# Allegro board myproject5.brd
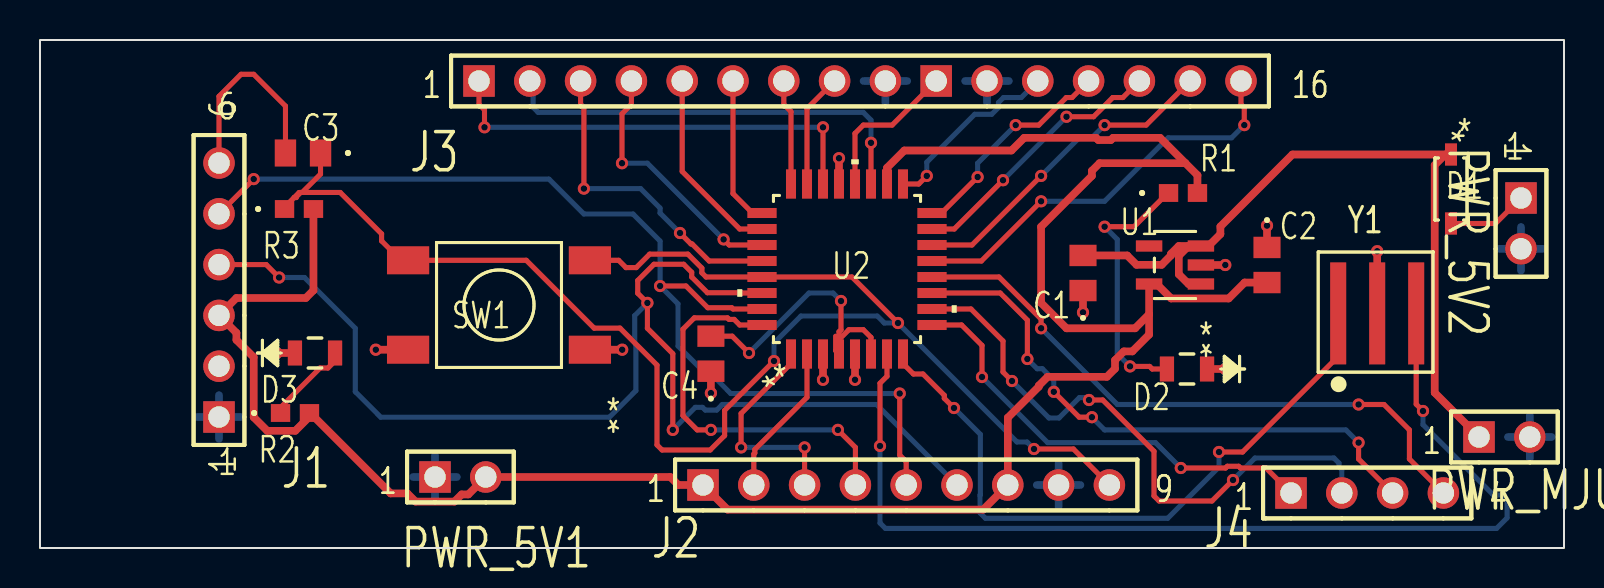
[diagram p0: board, top side]
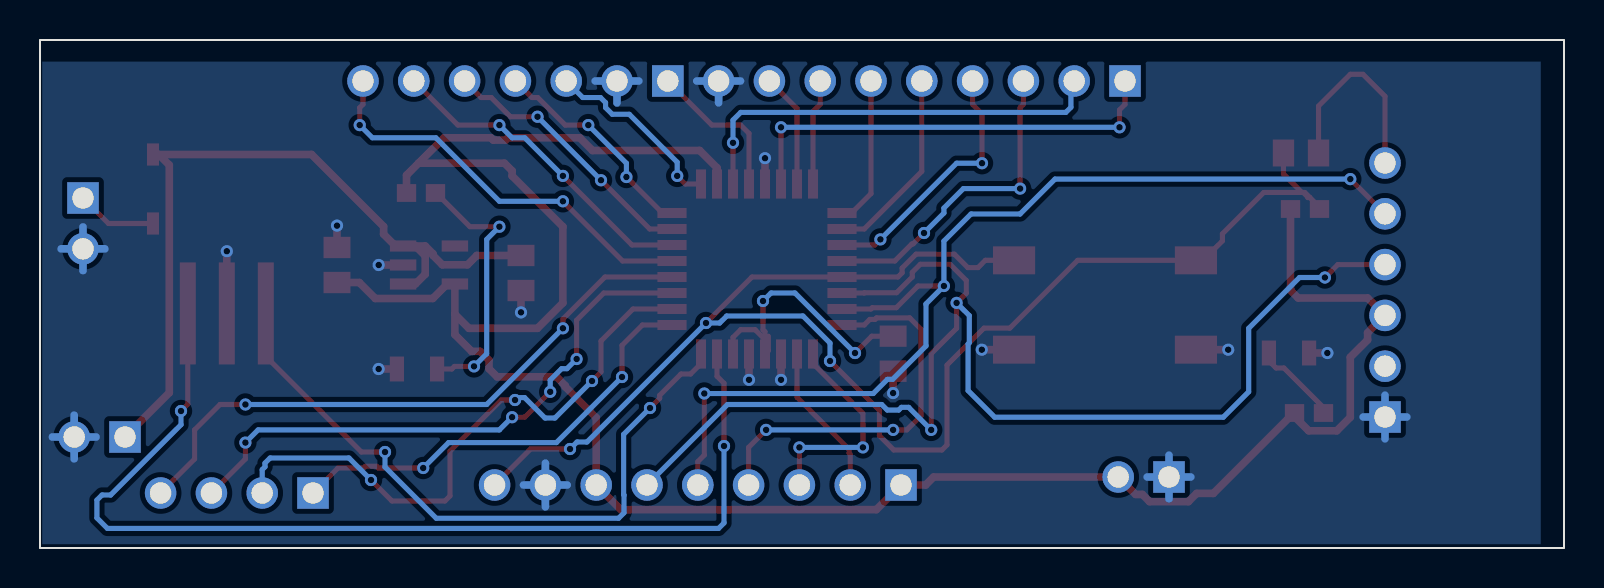
[diagram p1: board, bottom side, seen from below]

Outline 76.2 x 25.4 mm; copper layers: TOP, BOTTOM. Coordinates in mm from the lower left corner of the outline.
Outline path: rectangle 0,0 76.2,25.4

## Design rules (mm)
constraint set DEFAULT: min track width 0.254
nets with their own width: min track width 0.381; nets +5.0V +JACK GND

## Placement (name value [footprint] x y rotation side)
C1  1 uF  [CAP_0805C]  52.15 13.75 90 top
C2  100 nF  [CAP_0805C]  61.35 14.15 270 top
C3  100 nF  [CAP_0805C]  13.15 19.75 180 top
C4  100 nF  [CAP_0805C]  33.55 9.71 90 top
D1  DIODE  [SOD123]  70.55 17.95 270 top
D2  LED GREEN  [LED0805N_CML]  57.35 8.95 180 top
D3  LED GREEN  [LED0805N_CML]  13.75 9.75 0 top
J1  CON6 R/A  [BLKCON100VHTM1SQSW1006]  8.95 6.55 90 top
J2  CON9 R/A  [BLKCON100VHTM1SQSW1009]  33.15 3.15 0 top
J3  CON16  [BLKCON100VHTM1SQSW10016]  21.95 23.35 0 top
J4  CON4 R/A  [BLKCON100VHTM1SQSW1004]  62.55 2.75 0 top
NOREF  -  []  -31.8 -161.2 0 top
NOREF#2  -  []  0 25.4 0 top
NOREF#3  -  []  76.2 0 90 top
PWR_5V1  CON2  [BLKCON100VHTM1SQSW1002]  19.75 3.55 0 top
PWR_5V2  CON2  [BLKCON100VHTM1SQSW1002]  74.05 17.5 270 top
PWR_MJUMP1  CON2  [BLKCON100VHTM1SQSW1002]  71.95 5.55 0 top
R1  1k  [STA_RNCP0603]  57.15 17.75 0 top
R2  1k  [STA_RNCP0603]  12.75 6.75 0 top
R3  10k  [STA_RNCP0603]  12.95 16.95 0 top
SW1  SWITCH SPST-NO  [SW4_FSM-5P23]  22.95 12.15 180 top
U1  LDO  [SOT-23-5_MC]  56.75 14.15 180 top
U2  IC MCU 32KB  [MA]  40.35 13.95 90 top
Y1  16.00 MHz  [3-SMD]  66.95 11.75 0 top

## Library data of the parts
C1-C4 = CAP CER 0.1uF 50V X7R 0805: User Part Number: PN; Tolerance: TOL
D1 = DIODE 100V 300MA SOD12: User Part Number: PN; Tolerance: TOL
D2 D3 = LED GREEN 0805 SMD: User Part Number: PN; Tolerance: TOL
J1 = CONN HEADER R/A 6POS 2.54MM
J2 = CONN HEADER VERT 9POS 2.54MM
J3 = CONN HEADER VERT 16POS 2.54MM
J4 = CONN HEADER VERT 4POS 2.54MM
PWR_5V1 PWR_5V2 PWR_MJUMP1 = CONN HEADER VERT 2POS 2.54MM
R1 R2 = R 1K OHM 1% 1/8W 0603: User Part Number: PN; Tolerance: TOL
R3 = R 10K OHM 1% 1/8W 0603: User Part Number: PN; Tolerance: TOL
SW1 = SWITCH TACTILE SPST-NO 0.05A 24: User Part Number: PN; Tolerance: TOL
U1 = IC REG LINEAR 5V 300MA SOT23-5: User Part Number: PN; Tolerance: TOL
U2 = IC MCU 8BIT 32KB FLASH 32TQFP: User Part Number: PN; Tolerance: TOL
Y1 = RESONATOR 16.0MHZ 22PF SMD

## Footprints (pads in the part's own frame, mm; a bottom-side part is the same pattern mirrored in y, then rotated)
3-SMD
  rect 0.8x5.1 smd: 1(-2.04,-0.02) 2(-0.09,-0.02) 3(1.86,-0.02)
BLKCON100VHTM1SQSW1002
  rect 1.575x1.575 hole 1.067: 1(0,0)
  round 1.575 hole 1.067: 2(2.54,0)
BLKCON100VHTM1SQSW1004
  rect 1.575x1.575 hole 1.067: 1(0,0)
  round 1.575 hole 1.067: 2(2.54,0) 3(5.08,0) 4(7.62,0)
BLKCON100VHTM1SQSW1006
  rect 1.575x1.575 hole 1.067: 1(0,0)
  round 1.575 hole 1.067: 2(2.54,0) 3(5.08,0) 4(7.62,0) 5(10.16,0) 6(12.7,0)
BLKCON100VHTM1SQSW1009
  rect 1.575x1.575 hole 1.067: 1(0,0)
  round 1.575 hole 1.067: 2(2.54,0) 3(5.08,0) 4(7.62,0) 5(10.16,0) 6(12.7,0) 7(15.24,0) 8(17.78,0) 9(20.32,0)
BLKCON100VHTM1SQSW10016
  rect 1.575x1.575 hole 1.067: 1(0,0) 10(22.86,0)
  round 1.575 hole 1.067: 2(2.54,0) 3(5.08,0) 4(7.62,0) 5(10.16,0) 6(12.7,0) 7(15.24,0) 8(17.78,0) 9(20.32,0) 11(25.4,0) 12(27.94,0) 13(30.48,0) 14(33.02,0) 15(35.56,0) 16(38.1,0)
CAP_0805C
  rect 1.067x1.346 smd: 1(-0.876,0) 2(0.876,0)
LED0805N_CML
  rect 0.711x1.245 smd: 1(-1.003,0) 2(1.003,0)
MA
  rect 1.461x0.501 smd: 1(-4.25,2.8) 2(-4.25,2) 3(-4.25,1.2) 4(-4.25,0.4) 5(-4.25,-0.4) 6(-4.25,-1.2) 7(-4.25,-2) 8(-4.25,-2.8) 17(4.25,-2.8) 18(4.25,-2) 19(4.25,-1.2) 20(4.25,-0.4) 21(4.25,0.4) 22(4.25,1.2) 23(4.25,2) 24(4.25,2.8)
  rect 0.501x1.461 smd: 9(-2.8,-4.25) 10(-2,-4.25) 11(-1.2,-4.25) 12(-0.4,-4.25) 13(0.4,-4.25) 14(1.2,-4.25) 15(2,-4.25) 16(2.8,-4.25) 25(2.8,4.25) 26(2,4.25) 27(1.2,4.25) 28(0.4,4.25) 29(-0.4,4.25) 30(-1.2,4.25) 31(-2,4.25) 32(-2.8,4.25)
SOD123
  rect 1.111x0.601 smd: 1(-1.725,0) 2(1.725,0)
SOT-23-5_MC
  rect 1.321x0.559 smd: 1(-1.295,0.95) 2(-1.295,0) 3(-1.295,-0.95) 4(1.295,-0.95) 5(1.295,0.95)
STA_RNCP0603
  rect 0.965x0.889 smd: 1(-0.724,0) 2(0.724,0)
SW4_FSM-5P23
  rect 2.108x1.397 smd: 1(-4.547,2.235) 2(4.547,2.235) 3(-4.547,-2.235) 4(4.547,-2.235)

## Nets
+5.0V: C2.2 J1.3 J2.1 J2.7 PWR_5V1.2 R1.2 R2.2 R3.2 U1.5 U2.18
GND: C1.1 C2.1 C4.1 D2.1(CATHODE) D3.1(CATHODE) J1.1 J2.8 J3.9 J3.11 PWR_5V1.1 PWR_5V2.2 PWR_MJUMP1.2 SW1.1 SW1.2 U1.2 U2.3 U2.5 U2.21 Y1.2
+JACK: C1.2 D1.1 PWR_MJUMP1.1 U1.1 U1.3(\S\H\D\N\)
A0: J3.8 U2.23
A1: J3.7 U2.24
A2: J3.6 U2.25
A3: J3.5 U2.26
A4: J3.4 U2.27
A5: J3.3 U2.28
A6: J3.2 U2.19
A7: J3.1 U2.22
AREF: J3.10 U2.20
D2: J2.4 U2.32
D3: J2.3 U2.1
D4: J2.2 U2.2
D8: J4.4 U2.12
D9: J3.16 U2.13
D10: J3.15 U2.14
D11: J3.14 U2.15
D12: J3.13 U2.16
D13: J3.12 U2.17
EXT_RESET: C3.2 J1.6
RST: C3.1 J2.9 R3.1 SW1.3 SW1.4 U2.29
RX: J1.4 J2.6 U2.30
TX: J1.5 J2.5 U2.31
XTAL1_OUT: U2.7 Y1.3(OUTPUT)
XTAL2_IN: U2.8 Y1.1
N02670: D2.2 R1.1
N02674: D3.2 R2.1
N04587: C4.2 U2.4 U2.6(VCC_2)
N06378: J4.1 U2.9
N06380: J4.2 U2.10
N06382: J4.3 U2.11
N17473: D1.2 PWR_5V2.1

Pads without a net: J1 2; U1 4

## Via types
v1: diameter 0.61, hole 0.33, TOP to BOTTOM, 60 vias

## Routing (per net, layer and track width the routed paths; a pad name or vN(x,y) marks a point on that pad's centre or on a via; arc(x,y) is an arc through that point)
+5.0V: length 116
  TOP w0.381: 57.27,19.24 52.98,19.24 52.59,18.86 52.59,18.61 50.05,16.07 50.05,12.26 51.33,10.98 54.75,10.98 55.45,11.69 ; 57.27,19.24 56,20.51 53.65,20.51 53.54,20.4 52.92,20.4 52.81,20.51 49.21,20.51 48.57,19.88 43.22,19.88 42.35,19.01 U2.18 ; 57.27,19.24 57.87,18.64 R1.2 ; 55.45,11.69 U1.5 55.84,13.2 56.56,12.48 59.43,12.48 60.23,13.27 C2.2 ; 55.45,11.69 55.45,10.67 54.61,9.83 54.19,9.83 53.75,9.39 53.75,8.97 53.34,8.56 50.38,8.56 49.94,8.12 49.94,8.07 48.39,6.52 J2.7 47.16,1.92 34.38,1.92 J2.1 31.92,3.15 31.52,3.55 PWR_5V1.2 21.42,2.68 21.08,2.68 20.72,2.32 18.78,2.32 18.37,2.73 17.53,2.73 13.51,6.75 R2.2 13.47,6.57 12.77,5.86 11.36,5.86 10.69,6.54 10.69,9.54 9.82,10.4 9.82,10.76 J1.3 9.82,12.5 13.29,12.5 13.67,12.88 R3.2
GND: length 44.9
  TOP w0.381: C1.1 v1(52.15,11.78) ; D3.1 v1(11.83,9.75) ; U2.3 v1(39.15,8.41) ; C2.1 v1(61.35,16.12) ; C4.1 v1(33.55,7.75) ; Y1.2 v1(66.86,14.84) ; SW1.1 v1(29.11,9.91) ; U2.21 v1(39.95,19.49) ; SW1.2 v1(16.79,9.91) ; D2.1 v1(59.27,8.95) ; U2.5 v1(40.75,8.41) ; U1.2 v1(59.26,14.15)
  BOTTOM w0.381: J3.11 48.44,23.35 ; J3.11 46.26,23.35 ; J3.11 47.35,22.26 ; 19.75,2.46 PWR_5V1.1 ; PWR_5V1.1 19.75,4.64 ; PWR_5V1.1 18.66,3.55 ; PWR_5V1.1 20.84,3.55 ; 50.93,2.06 J2.8 ; J2.8 52.02,3.15 ; J2.8 50.93,4.24 ; J2.8 49.84,3.15 ; PWR_MJUMP1.2 74.49,6.64 ; PWR_MJUMP1.2 73.4,5.55 ; PWR_MJUMP1.2 74.49,4.46 ; PWR_MJUMP1.2 75.58,5.55 ; 72.96,14.96 PWR_5V2.2 ; PWR_5V2.2 74.05,13.87 ; PWR_5V2.2 75.14,14.96 ; PWR_5V2.2 74.05,16.05 ; 7.86,6.55 J1.1 ; J1.1 8.95,7.64 ; J1.1 8.95,5.46 ; J1.1 10.04,6.55 ; J3.9 43.36,23.35 ; J3.9 42.27,22.26 ; J3.9 41.18,23.35
+JACK: length 39.3
  TOP w0.381: 57.43,15.1 U1.3 58.43,15.1 59.02,15.69 59.02,16.07 62.62,19.68 70.26,19.68 ; 57.43,15.1 56.94,15.1 56.55,14.71 56.55,14.63 56.08,14.16 54.83,14.16 54.36,14.63 C1.2 ; 57.43,15.1 56.94,14.61 56.94,13.69 57.43,13.2 U1.1 ; 70.26,19.68 69.74,19.15 69.74,7.76 PWR_MJUMP1.1 ; 70.26,19.68 D1.1
A0: length 5.7
  TOP w0.254: J3.8 38.35,21.97 U2.23
A1: length 5.3
  TOP w0.254: J3.7 37.19,22.18 37.55,21.82 U2.24
A2: length 7.5
  TOP w0.254: U2.25 35.62,16.75 34.65,17.72 J3.6
A3: length 9.7
  TOP w0.254: U2.26 34.99,15.95 32.11,18.83 J3.5
A4: length 13
  TOP w0.254: v1(29.1,19.24) 29.1,21.71 29.57,22.18 J3.4 ; U2.27 34.46,15.15 v1(34.18,15.43)
  BOTTOM w0.254: v1(34.18,15.43) 30.37,19.24 v1(29.1,19.24)
A5: length 16
  TOP w0.254: J3.3 27.03,22.18 27.2,22.02 v1(27.2,17.97) ; U2.28 33.46,14.35 32.61,15.2 32.55,15.2 v1(32,15.75)
  BOTTOM w0.254: v1(27.2,17.97) 30.03,17.97 31,17 31,16.75 v1(32,15.75)
A6: length 21.7
  TOP w0.254: U2.19 v1(41.55,20.26)
  BOTTOM w0.254: v1(41.55,20.26) 41.55,21.39 41.16,21.78 24.91,21.78 24.66,22.03 24.66,23.18 J3.2
A7: length 22.2
  TOP w0.254: J3.1 21.95,22.18 22.23,21.91 v1(22.23,21.04) ; U2.22 v1(39.15,21.04)
  BOTTOM w0.254: v1(39.15,21.04) v1(22.23,21.04)
AREF: length 7.7
  TOP w0.254: J3.10 42.6,21.14 41.16,21.14 40.75,20.73 U2.20
D2: length 19.8
  TOP w0.254: v1(33.55,5.91) 32.86,5.91 32.15,6.62 32.15,10.94 32.71,11.51 34.38,11.51 34.45,11.43 34.71,11.43 34.99,11.15 U2.32 ; J2.4 40.77,5.03 v1(39.9,5.91)
  BOTTOM w0.254: v1(39.9,5.91) v1(33.55,5.91)
D3: length 10.8
  TOP w0.254: v1(35.05,5.03) 35.05,6.72 37.55,9.22 U2.1 ; J2.3 v1(38.23,5.03)
  BOTTOM w0.254: v1(38.23,5.03) v1(35.05,5.03)
D4: length 7.7
  TOP w0.254: J2.2 35.69,4.7 35.74,4.75 35.74,4.93 38.35,7.54 U2.2
D8: length 31.2
  TOP w0.254: v1(65.93,7.17) 67.2,7.17 68.47,5.91 68.47,4.45 J4.4 ; U2.12 47.95,13.55 50.05,11.45 v1(50.05,10.98)
  BOTTOM w0.254: v1(65.93,7.17) 53.87,7.17 v1(50.05,10.98)
D9: length 20.7
  TOP w0.254: v1(60.22,21.14) 60.22,22.02 60.05,22.18 J3.16 ; U2.13 47.07,14.35 v1(50.05,17.34)
  BOTTOM w0.254: v1(60.22,21.14) 59.58,20.51 56.41,20.51 53.23,17.34 v1(50.05,17.34)
D10: length 16.3
  TOP w0.254: v1(50.05,18.61) 46.6,15.15 U2.14 ; v1(53.23,21.14) 55.3,21.14 J3.15
  BOTTOM w0.254: v1(53.23,21.14) 52.59,20.51 51.96,20.51 v1(50.05,18.61)
D11: length 13.4
  TOP w0.254: U2.15 45.71,15.95 v1(48.15,18.39) ; v1(51.33,21.56) 52.68,21.56 53.64,22.52 54.14,22.52 J3.14
  BOTTOM w0.254: v1(48.15,18.39) v1(51.33,21.56)
D12: length 11
  TOP w0.254: v1(46.88,18.55) 45.08,16.75 U2.16 ; v1(48.78,21.14) 49.94,21.14 51.32,22.52 51.6,22.52 J3.13
  BOTTOM w0.254: v1(48.78,21.14) 46.88,19.24 v1(46.88,18.55)
D13: length 9.4
  TOP w0.254: v1(44.34,18.61) 43.94,18.2 U2.17
  BOTTOM w0.254: v1(44.34,18.61) 44.34,19.29 46.74,21.69 47.59,21.69 47.92,22.02 47.92,22.27 48.18,22.52 49.06,22.52 J3.12
EXT_RESET: length 10.1
  TOP w0.254: J1.6 8.95,22.59 10.05,23.68 10.69,23.68 12.27,22.1 C3.2
RST: length 77.3
  TOP w0.254: v1(36.7,9.35) 34.23,6.88 34.23,5.62 33.51,4.9 31.1,4.9 30.85,5.15 30.85,9.14 29,10.99 27.71,10.99 24.31,14.39 SW1.4 18.05,14.39 17.08,15.35 17.08,15.71 15.01,17.78 13.11,17.78 ; 12.71,17.52 12.23,17.04 R3.1 ; 12.71,17.52 12.96,17.78 13.03,17.78 ; 12.71,17.52 12.81,17.52 12.81,17.55 13.03,17.78 ; SW1.3 28.93,14.39 29.3,14.02 29.81,14.02 30.49,14.69 32.39,14.69 33.09,13.99 33.09,13.76 33.3,13.55 U2.29 40.6,13.55 v1(42.9,11.25) ; 13.11,17.78 14.03,18.7 C3.1 ; 13.11,17.78 13.03,17.78 ; v1(49.7,4.95) 51.67,4.95 J2.9
  BOTTOM w0.254: v1(36.7,9.35) 36.7,10.25 38.05,11.6 41.86,11.6 42.21,11.25 v1(42.9,11.25) 48.85,5.3 49.35,5.3 v1(49.7,4.95)
RX: length 63.1
  TOP w0.254: U2.30 34.99,12.75 34.98,12.76 33.37,12.76 32.59,13.55 32.59,13.78 32.18,14.19 30.7,14.19 29.89,13.37 29.89,12.74 v1(30.37,12.26) 30.37,10.98 31.64,9.71 v1(31.64,5.91) ; v1(11.96,13.53) 11.31,14.17 J1.4
  BOTTOM w0.254: v1(11.96,13.53) 13.22,13.53 15.77,10.98 15.77,7.81 17.04,6.54 28.46,6.54 29.8,7.87 29.8,10.2 29.73,10.26 29.73,11.62 v1(30.37,12.26) ; v1(31.64,5.91) 32.77,7.03 33.13,7.03 33.27,6.9 33.83,6.9 34.11,7.17 41.83,7.17 J2.6
TX: length 52
  TOP w0.254: J1.5 v1(10.69,18.45) ; U2.31 34.65,11.95 34.59,12.01 33.39,12.01 32.3,13.1 v1(31,13.1) ; J2.5 43.31,4.32 42.98,4.64 v1(42.98,7.72)
  BOTTOM w0.254: v1(42.98,7.72) 34.54,7.72 33.83,8.43 33.57,8.43 31.9,10.1 31.9,12.21 v1(31,13.1) 31,15.35 29.65,16.7 27.2,16.7 25.45,18.45 v1(10.69,18.45)
XTAL1_OUT: length 52.6
  TOP w0.254: Y1.3 68.81,7.19 v1(69.15,6.85) ; U2.7 42.35,8.59 42,8.24 v1(42,5.1)
  BOTTOM w0.254: v1(69.15,6.85) 69.15,6.16 72.66,2.65 73.1,2.65 73.35,2.4 73.35,1.5 72.83,0.98 42.27,0.98 42,1.25 v1(42,5.1)
XTAL2_IN: length 33.8
  TOP w0.254: Y1.1 64.91,9.58 60.13,4.8 v1(58.95,4.8) ; v1(45.7,7) 45.22,7.49 45.22,7.63 44.15,8.7 43.67,8.7 43.15,9.22 U2.8
  BOTTOM w0.254: v1(45.7,7) 47.02,5.68 47.02,2.67 47,2.65 47,1.76 47.27,1.49 56.39,1.49 58.95,4.05 v1(58.95,4.8)
N02670: length 13.3
  TOP w0.254: v1(54.5,9.08) 55.48,9.08 55.61,8.95 D2.2 ; R1.1 56.39,17.75 54.7,16.07 v1(53.23,16.07)
  BOTTOM w0.254: v1(53.23,16.07) 53.87,15.43 53.87,9.71 v1(54.5,9.08)
N02674: length 4.4
  TOP w0.254: D3.2 14.75,9.35 14.4,9 14,9 12.03,7.02 R2.1
N04587: length 14.7
  TOP w0.254: 39.78,10.59 39.78,9.87 U2.4 39.95,10.42 ; v1(35.45,9.75) 34.61,10.59 C4.2 ; 39.95,10.42 40.45,10.91 41.16,10.91 41.55,10.53 U2.6 ; 39.95,10.42 39.95,10.81 40.05,10.91 v1(40.05,12.35)
  BOTTOM w0.254: v1(40.05,12.35) 39.65,12.75 38.45,12.75 v1(35.45,9.75)
N06378: length 22.4
  TOP w0.254: v1(57.04,4) 59.28,4 59.37,4.09 59.93,4.09 60.02,4 61.3,4 J4.1 ; v1(47.1,8.55) 47.1,10.13 46.08,11.15 U2.9
  BOTTOM w0.254: v1(57.04,4) 55.77,5.27 50.38,5.27 v1(47.1,8.55)
N06380: length 29.9
  TOP w0.254: U2.10 46.55,11.95 48.15,10.35 48.15,8.8 v1(48.6,8.35) ; v1(52.45,7.4) 53.14,7.4 55.7,4.84 55.7,2.6 55.95,2.35 58.6,2.35 v1(59.65,3.4)
  BOTTOM w0.254: v1(48.6,8.35) 50.45,6.5 50.95,6.5 51.97,7.52 52.33,7.52 v1(52.45,7.4) ; v1(59.65,3.4) 60.75,4.5 64.7,4.5 64.95,4.25 64.95,4.06 65.09,3.92 J4.2
N06382: length 29.1
  TOP w0.254: v1(52.59,6.54) 51.96,6.54 v1(50.69,7.81) ; U2.11 48.01,12.75 49.37,11.39 v1(49.37,9.45) ; v1(65.93,5.27) 65.93,4.45 J4.3
  BOTTOM w0.254: v1(52.59,6.54) 53.23,5.91 65.3,5.91 v1(65.93,5.27) ; v1(49.37,9.45) 49.85,8.96 50.12,8.96 50.69,8.39 v1(50.69,7.81)
N17473: length 4
  TOP w0.254: 70.55,16.23 72.78,16.23 PWR_5V2.1

## Copper pours and planes (outline as drawn; the poured copper is in the pictures)
GND on BOTTOM: 1.16,24.32 1.16,0.19 76.09,0.19 76.09,24.32

## Text on the board
XSECTION_CHART: *  SURFACE | L1 TOP CONDUCTOR | *  DIELECTRIC | L2 BOTTOM CONDUCTOR | DESIGN CROSS SECTION CHART | ___________________________ | TOTAL THICKNESS 0.26416 MM | 1-2
PAGE_OUTLINE: FIGURE | FINISHED_SIZE | 0.3302 | 1.0668 | DRILL CHART: TOP to BOTTOM | ALL UNITS ARE IN MILLIMETERS | DRILLED_SIZE | - | PLATED | QTY | 60 | 41
